# EAGLE board LilyPad SimplePower Panel-v14 (EAGLE 6.4)
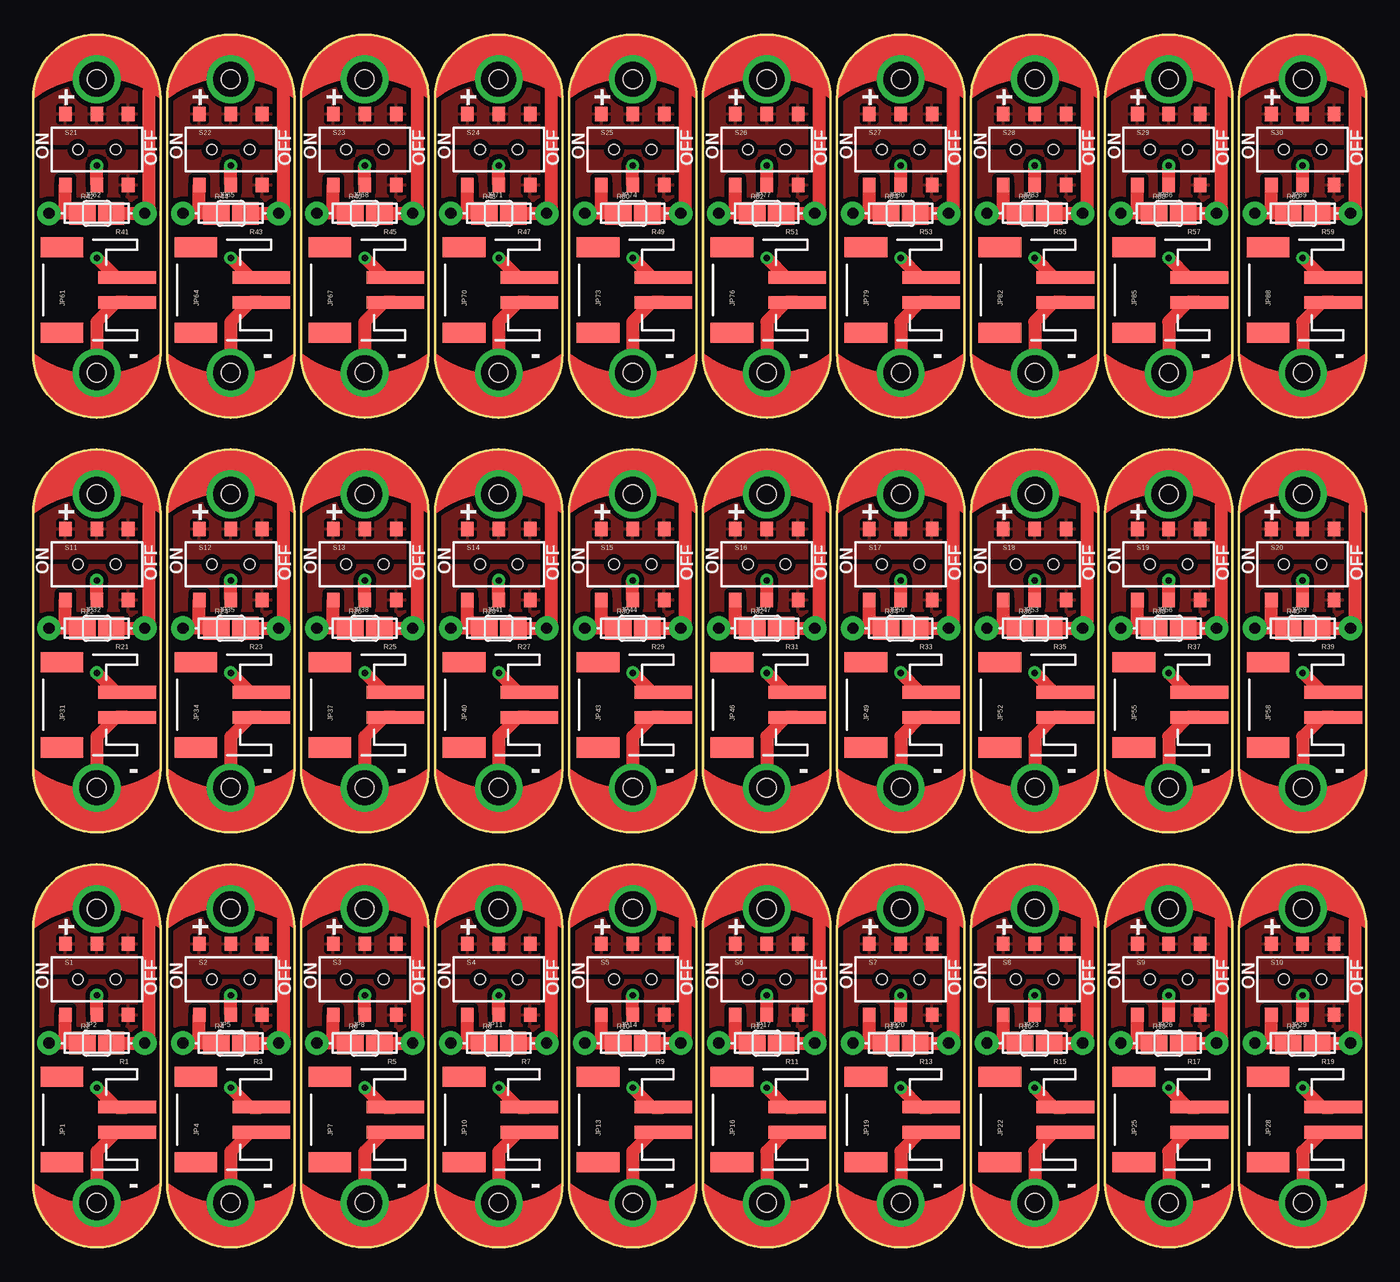
[diagram p0: board, top side]
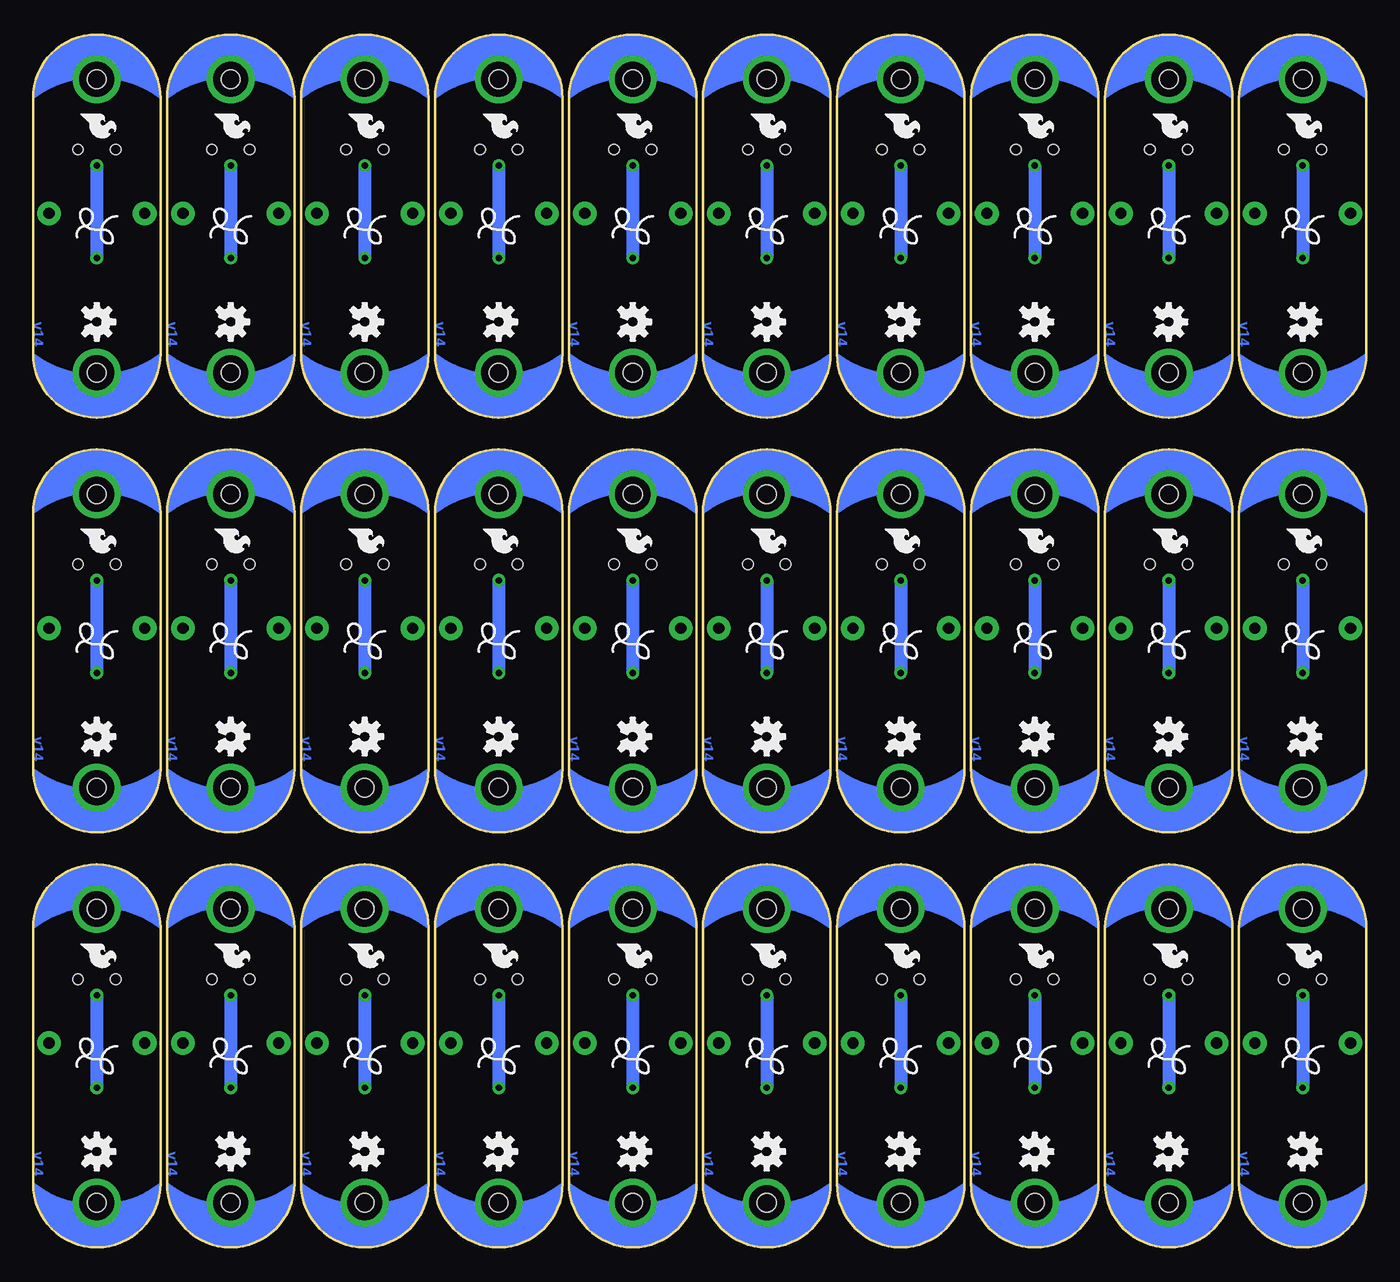
[diagram p1: board, bottom side, seen from below]

Size 106.17 x 96.52 mm. Coordinates in mm from the lower left corner, seen from the top.
Outline: 10.16,5.08 10.16,25.4 arc180 0,25.4 0,5.08 arc180 10.16,5.08
Outline: 20.83,5.08 20.83,25.4 arc180 10.67,25.4 10.67,5.08 arc180 20.83,5.08
Outline: 31.5,5.08 31.5,25.4 arc180 21.34,25.4 21.34,5.08 arc180 31.5,5.08
Outline: 42.16,5.08 42.16,25.4 arc180 32,25.4 32,5.08 arc180 42.16,5.08
Outline: 52.83,5.08 52.83,25.4 arc180 42.67,25.4 42.67,5.08 arc180 52.83,5.08
Outline: 63.5,5.08 63.5,25.4 arc180 53.34,25.4 53.34,5.08 arc180 63.5,5.08
Outline: 74.17,5.08 74.17,25.4 arc180 64.01,25.4 64.01,5.08 arc180 74.17,5.08
Outline: 84.84,5.08 84.84,25.4 arc180 74.68,25.4 74.68,5.08 arc180 84.84,5.08
Outline: 95.5,5.08 95.5,25.4 arc180 85.34,25.4 85.34,5.08 arc180 95.5,5.08
Outline: 106.17,5.08 106.17,25.4 arc180 96.01,25.4 96.01,5.08 arc180 106.17,5.08
Outline: 10.16,38.1 10.16,58.42 arc180 0,58.42 0,38.1 arc180 10.16,38.1
Outline: 20.83,38.1 20.83,58.42 arc180 10.67,58.42 10.67,38.1 arc180 20.83,38.1
Outline: 31.5,38.1 31.5,58.42 arc180 21.34,58.42 21.34,38.1 arc180 31.5,38.1
Outline: 42.16,38.1 42.16,58.42 arc180 32,58.42 32,38.1 arc180 42.16,38.1
Outline: 52.83,38.1 52.83,58.42 arc180 42.67,58.42 42.67,38.1 arc180 52.83,38.1
Outline: 63.5,38.1 63.5,58.42 arc180 53.34,58.42 53.34,38.1 arc180 63.5,38.1
Outline: 74.17,38.1 74.17,58.42 arc180 64.01,58.42 64.01,38.1 arc180 74.17,38.1
Outline: 84.84,38.1 84.84,58.42 arc180 74.68,58.42 74.68,38.1 arc180 84.84,38.1
Outline: 95.5,38.1 95.5,58.42 arc180 85.34,58.42 85.34,38.1 arc180 95.5,38.1
Outline: 106.17,38.1 106.17,58.42 arc180 96.01,58.42 96.01,38.1 arc180 106.17,38.1
Outline: 10.16,71.12 10.16,91.44 arc180 0,91.44 0,71.12 arc180 10.16,71.12
Outline: 20.83,71.12 20.83,91.44 arc180 10.67,91.44 10.67,71.12 arc180 20.83,71.12
Outline: 31.5,71.12 31.5,91.44 arc180 21.34,91.44 21.34,71.12 arc180 31.5,71.12
Outline: 42.16,71.12 42.16,91.44 arc180 32,91.44 32,71.12 arc180 42.16,71.12
Outline: 52.83,71.12 52.83,91.44 arc180 42.67,91.44 42.67,71.12 arc180 52.83,71.12
Outline: 63.5,71.12 63.5,91.44 arc180 53.34,91.44 53.34,71.12 arc180 63.5,71.12
Outline: 74.17,71.12 74.17,91.44 arc180 64.01,91.44 64.01,71.12 arc180 74.17,71.12
Outline: 84.84,71.12 84.84,91.44 arc180 74.68,91.44 74.68,71.12 arc180 84.84,71.12
Outline: 95.5,71.12 95.5,91.44 arc180 85.34,91.44 85.34,71.12 arc180 95.5,71.12
Outline: 106.17,71.12 106.17,91.44 arc180 96.01,91.44 96.01,71.12 arc180 106.17,71.12
Copper layers (1*16): Top 0.035mm / dielectric 1.5mm / Bottom 0.035mm
Design rules "SparkFun": minimum track width 8mil, minimum drill 20mil, track to track 8mil, track to pad 8mil, pad to pad 8mil, via to via 8mil, smd to smd 8mil, copper to edge 10mil, drill to drill 8mil, minimum pad ring 12mil, minimum via ring 10mil, stop-mask expansion 4mil, vias tented up to drill 20mil, thermal gap 10mil

## Footprints (pad centres in the part's own frame; a part is rotated, then mirrored left to right if it is on the bottom)
JST-2-SMD = smd 1 x 4.6: 1 -1,-3.7; 2 1,-3.7 | smd 1.6 x 3.4: NC1 -3.4,1.5; NC2 3.4,1.5
SJ_2S = smd 0.635 x 1.27: 1 -0.412,0; 2 0.412,0
AXIAL-0.3 = drill 0.9 pad 1.88: P$1 -3.81,0; P$2 3.81,0
1206 = smd 1.6 x 1.8: 1 -1.4,0; 2 1.4,0
AYZ0202 = smd 1 x 1.15: 1 -2.5,2.825; 2 0,2.825; 3 2.5,2.825; 4 -2.5,-2.825; 5 0,-2.825; 6 2.5,-2.825 | hole 0.85: 1.5,0; -1.5,0
PETAL-LARGE-2SIDE = drill 2.794: 1 0,3.556 | hole 1.5: 0,3.556

## Placement (x,y rotation side)
JP1  [JST-2-SMD]  3.81,10.16 90 top
JP2  [SJ_2S]  5.08,16.26 0 top
JP3  LOGO-SFESK  [SFE-LOGO-FLAME]  6.35,24.13 270 bottom
JP4  [JST-2-SMD]  14.48,10.16 90 top
JP5  [SJ_2S]  15.75,16.26 0 top
JP6  LOGO-SFESK  [SFE-LOGO-FLAME]  17.02,24.13 270 bottom
JP7  [JST-2-SMD]  25.15,10.16 90 top
JP8  [SJ_2S]  26.42,16.26 0 top
JP9  LOGO-SFESK  [SFE-LOGO-FLAME]  27.69,24.13 270 bottom
JP10  [JST-2-SMD]  35.81,10.16 90 top
JP11  [SJ_2S]  37.08,16.26 0 top
JP12  LOGO-SFESK  [SFE-LOGO-FLAME]  38.35,24.13 270 bottom
JP13  [JST-2-SMD]  46.48,10.16 90 top
JP14  [SJ_2S]  47.75,16.26 0 top
JP15  LOGO-SFESK  [SFE-LOGO-FLAME]  49.02,24.13 270 bottom
JP16  [JST-2-SMD]  57.15,10.16 90 top
JP17  [SJ_2S]  58.42,16.26 0 top
JP18  LOGO-SFESK  [SFE-LOGO-FLAME]  59.69,24.13 270 bottom
JP19  [JST-2-SMD]  67.82,10.16 90 top
JP20  [SJ_2S]  69.09,16.26 0 top
JP21  LOGO-SFESK  [SFE-LOGO-FLAME]  70.36,24.13 270 bottom
JP22  [JST-2-SMD]  78.49,10.16 90 top
JP23  [SJ_2S]  79.76,16.26 0 top
JP24  LOGO-SFESK  [SFE-LOGO-FLAME]  81.03,24.13 270 bottom
JP25  [JST-2-SMD]  89.15,10.16 90 top
JP26  [SJ_2S]  90.42,16.26 0 top
JP27  LOGO-SFESK  [SFE-LOGO-FLAME]  91.69,24.13 270 bottom
JP28  [JST-2-SMD]  99.82,10.16 90 top
JP29  [SJ_2S]  101.09,16.26 0 top
JP30  LOGO-SFESK  [SFE-LOGO-FLAME]  102.36,24.13 270 bottom
JP31  [JST-2-SMD]  3.81,43.18 90 top
JP32  [SJ_2S]  5.08,49.28 0 top
JP33  LOGO-SFESK  [SFE-LOGO-FLAME]  6.35,57.15 270 bottom
JP34  [JST-2-SMD]  14.48,43.18 90 top
JP35  [SJ_2S]  15.75,49.28 0 top
JP36  LOGO-SFESK  [SFE-LOGO-FLAME]  17.02,57.15 270 bottom
JP37  [JST-2-SMD]  25.15,43.18 90 top
JP38  [SJ_2S]  26.42,49.28 0 top
JP39  LOGO-SFESK  [SFE-LOGO-FLAME]  27.69,57.15 270 bottom
JP40  [JST-2-SMD]  35.81,43.18 90 top
JP41  [SJ_2S]  37.08,49.28 0 top
JP42  LOGO-SFESK  [SFE-LOGO-FLAME]  38.35,57.15 270 bottom
JP43  [JST-2-SMD]  46.48,43.18 90 top
JP44  [SJ_2S]  47.75,49.28 0 top
JP45  LOGO-SFESK  [SFE-LOGO-FLAME]  49.02,57.15 270 bottom
JP46  [JST-2-SMD]  57.15,43.18 90 top
JP47  [SJ_2S]  58.42,49.28 0 top
JP48  LOGO-SFESK  [SFE-LOGO-FLAME]  59.69,57.15 270 bottom
JP49  [JST-2-SMD]  67.82,43.18 90 top
JP50  [SJ_2S]  69.09,49.28 0 top
JP51  LOGO-SFESK  [SFE-LOGO-FLAME]  70.36,57.15 270 bottom
JP52  [JST-2-SMD]  78.49,43.18 90 top
JP53  [SJ_2S]  79.76,49.28 0 top
JP54  LOGO-SFESK  [SFE-LOGO-FLAME]  81.03,57.15 270 bottom
JP55  [JST-2-SMD]  89.15,43.18 90 top
JP56  [SJ_2S]  90.42,49.28 0 top
JP57  LOGO-SFESK  [SFE-LOGO-FLAME]  91.69,57.15 270 bottom
JP58  [JST-2-SMD]  99.82,43.18 90 top
JP59  [SJ_2S]  101.09,49.28 0 top
JP60  LOGO-SFESK  [SFE-LOGO-FLAME]  102.36,57.15 270 bottom
JP61  [JST-2-SMD]  3.81,76.2 90 top
JP62  [SJ_2S]  5.08,82.3 0 top
JP63  LOGO-SFESK  [SFE-LOGO-FLAME]  6.35,90.17 270 bottom
JP64  [JST-2-SMD]  14.48,76.2 90 top
JP65  [SJ_2S]  15.75,82.3 0 top
JP66  LOGO-SFESK  [SFE-LOGO-FLAME]  17.02,90.17 270 bottom
JP67  [JST-2-SMD]  25.15,76.2 90 top
JP68  [SJ_2S]  26.42,82.3 0 top
JP69  LOGO-SFESK  [SFE-LOGO-FLAME]  27.69,90.17 270 bottom
JP70  [JST-2-SMD]  35.81,76.2 90 top
JP71  [SJ_2S]  37.08,82.3 0 top
JP72  LOGO-SFESK  [SFE-LOGO-FLAME]  38.35,90.17 270 bottom
JP73  [JST-2-SMD]  46.48,76.2 90 top
JP74  [SJ_2S]  47.75,82.3 0 top
JP75  LOGO-SFESK  [SFE-LOGO-FLAME]  49.02,90.17 270 bottom
JP76  [JST-2-SMD]  57.15,76.2 90 top
JP77  [SJ_2S]  58.42,82.3 0 top
JP78  LOGO-SFESK  [SFE-LOGO-FLAME]  59.69,90.17 270 bottom
JP79  [JST-2-SMD]  67.82,76.2 90 top
JP80  [SJ_2S]  69.09,82.3 0 top
JP81  LOGO-SFESK  [SFE-LOGO-FLAME]  70.36,90.17 270 bottom
JP82  [JST-2-SMD]  78.49,76.2 90 top
JP83  [SJ_2S]  79.76,82.3 0 top
JP84  LOGO-SFESK  [SFE-LOGO-FLAME]  81.03,90.17 270 bottom
JP85  [JST-2-SMD]  89.15,76.2 90 top
JP86  [SJ_2S]  90.42,82.3 0 top
JP87  LOGO-SFESK  [SFE-LOGO-FLAME]  91.69,90.17 270 bottom
JP88  [JST-2-SMD]  99.82,76.2 90 top
JP89  [SJ_2S]  101.09,82.3 0 top
JP90  LOGO-SFESK  [SFE-LOGO-FLAME]  102.36,90.17 270 bottom
R1  [AXIAL-0.3]  5.08,16.26 180 top
R2  [1206]  5.08,16.26 0 top
R3  [AXIAL-0.3]  15.75,16.26 180 top
R4  [1206]  15.75,16.26 0 top
R5  [AXIAL-0.3]  26.42,16.26 180 top
R6  [1206]  26.42,16.26 0 top
R7  [AXIAL-0.3]  37.08,16.26 180 top
R8  [1206]  37.08,16.26 0 top
R9  [AXIAL-0.3]  47.75,16.26 180 top
R10  [1206]  47.75,16.26 0 top
R11  [AXIAL-0.3]  58.42,16.26 180 top
R12  [1206]  58.42,16.26 0 top
R13  [AXIAL-0.3]  69.09,16.26 180 top
R14  [1206]  69.09,16.26 0 top
R15  [AXIAL-0.3]  79.76,16.26 180 top
R16  [1206]  79.76,16.26 0 top
R17  [AXIAL-0.3]  90.42,16.26 180 top
R18  [1206]  90.42,16.26 0 top
R19  [AXIAL-0.3]  101.09,16.26 180 top
R20  [1206]  101.09,16.26 0 top
R21  [AXIAL-0.3]  5.08,49.28 180 top
R22  [1206]  5.08,49.28 0 top
R23  [AXIAL-0.3]  15.75,49.28 180 top
R24  [1206]  15.75,49.28 0 top
R25  [AXIAL-0.3]  26.42,49.28 180 top
R26  [1206]  26.42,49.28 0 top
R27  [AXIAL-0.3]  37.08,49.28 180 top
R28  [1206]  37.08,49.28 0 top
R29  [AXIAL-0.3]  47.75,49.28 180 top
R30  [1206]  47.75,49.28 0 top
R31  [AXIAL-0.3]  58.42,49.28 180 top
R32  [1206]  58.42,49.28 0 top
R33  [AXIAL-0.3]  69.09,49.28 180 top
R34  [1206]  69.09,49.28 0 top
R35  [AXIAL-0.3]  79.76,49.28 180 top
R36  [1206]  79.76,49.28 0 top
R37  [AXIAL-0.3]  90.42,49.28 180 top
R38  [1206]  90.42,49.28 0 top
R39  [AXIAL-0.3]  101.09,49.28 180 top
R40  [1206]  101.09,49.28 0 top
R41  [AXIAL-0.3]  5.08,82.3 180 top
R42  [1206]  5.08,82.3 0 top
R43  [AXIAL-0.3]  15.75,82.3 180 top
R44  [1206]  15.75,82.3 0 top
R45  [AXIAL-0.3]  26.42,82.3 180 top
R46  [1206]  26.42,82.3 0 top
R47  [AXIAL-0.3]  37.08,82.3 180 top
R48  [1206]  37.08,82.3 0 top
R49  [AXIAL-0.3]  47.75,82.3 180 top
R50  [1206]  47.75,82.3 0 top
R51  [AXIAL-0.3]  58.42,82.3 180 top
R52  [1206]  58.42,82.3 0 top
R53  [AXIAL-0.3]  69.09,82.3 180 top
R54  [1206]  69.09,82.3 0 top
R55  [AXIAL-0.3]  79.76,82.3 180 top
R56  [1206]  79.76,82.3 0 top
R57  [AXIAL-0.3]  90.42,82.3 180 top
R58  [1206]  90.42,82.3 0 top
R59  [AXIAL-0.3]  101.09,82.3 180 top
R60  [1206]  101.09,82.3 0 top
S1  Power  [AYZ0202]  5.08,21.34 0 top
S2  Power  [AYZ0202]  15.75,21.34 0 top
S3  Power  [AYZ0202]  26.42,21.34 0 top
S4  Power  [AYZ0202]  37.08,21.34 0 top
S5  Power  [AYZ0202]  47.75,21.34 0 top
S6  Power  [AYZ0202]  58.42,21.34 0 top
S7  Power  [AYZ0202]  69.09,21.34 0 top
S8  Power  [AYZ0202]  79.76,21.34 0 top
S9  Power  [AYZ0202]  90.42,21.34 0 top
S10  Power  [AYZ0202]  101.09,21.34 0 top
S11  Power  [AYZ0202]  5.08,54.36 0 top
S12  Power  [AYZ0202]  15.75,54.36 0 top
S13  Power  [AYZ0202]  26.42,54.36 0 top
S14  Power  [AYZ0202]  37.08,54.36 0 top
S15  Power  [AYZ0202]  47.75,54.36 0 top
S16  Power  [AYZ0202]  58.42,54.36 0 top
S17  Power  [AYZ0202]  69.09,54.36 0 top
S18  Power  [AYZ0202]  79.76,54.36 0 top
S19  Power  [AYZ0202]  90.42,54.36 0 top
S20  Power  [AYZ0202]  101.09,54.36 0 top
S21  Power  [AYZ0202]  5.08,87.38 0 top
S22  Power  [AYZ0202]  15.75,87.38 0 top
S23  Power  [AYZ0202]  26.42,87.38 0 top
S24  Power  [AYZ0202]  37.08,87.38 0 top
S25  Power  [AYZ0202]  47.75,87.38 0 top
S26  Power  [AYZ0202]  58.42,87.38 0 top
S27  Power  [AYZ0202]  69.09,87.38 0 top
S28  Power  [AYZ0202]  79.76,87.38 0 top
S29  Power  [AYZ0202]  90.42,87.38 0 top
S30  Power  [AYZ0202]  101.09,87.38 0 top
U$1  LOGO-LPL  [LOGO-L]  5.08,15.24 270 bottom
U$2  SEWTAP7  [PETAL-LARGE-2SIDE]  15.75,0 0 top
U$3  SEWTAP7  [PETAL-LARGE-2SIDE]  5.08,0 0 top
U$4  SEWTAP7  [PETAL-LARGE-2SIDE]  5.08,30.48 180 top
U$5  OSHW-LOGOS  [OSHW-LOGO-S]  5.08,7.62 270 bottom
U$6  SEWTAP7  [PETAL-LARGE-2SIDE]  15.75,30.48 180 top
U$7  LOGO-LPL  [LOGO-L]  15.75,15.24 270 bottom
U$8  OSHW-LOGOS  [OSHW-LOGO-S]  15.75,7.62 270 bottom
U$9  SEWTAP7  [PETAL-LARGE-2SIDE]  26.42,0 0 top
U$10  SEWTAP7  [PETAL-LARGE-2SIDE]  26.42,30.48 180 top
U$11  LOGO-LPL  [LOGO-L]  26.42,15.24 270 bottom
U$12  OSHW-LOGOS  [OSHW-LOGO-S]  26.42,7.62 270 bottom
U$13  SEWTAP7  [PETAL-LARGE-2SIDE]  37.08,0 0 top
U$14  SEWTAP7  [PETAL-LARGE-2SIDE]  37.08,30.48 180 top
U$15  LOGO-LPL  [LOGO-L]  37.08,15.24 270 bottom
U$16  OSHW-LOGOS  [OSHW-LOGO-S]  37.08,7.62 270 bottom
U$17  SEWTAP7  [PETAL-LARGE-2SIDE]  47.75,0 0 top
U$18  SEWTAP7  [PETAL-LARGE-2SIDE]  47.75,30.48 180 top
U$19  LOGO-LPL  [LOGO-L]  47.75,15.24 270 bottom
U$20  OSHW-LOGOS  [OSHW-LOGO-S]  47.75,7.62 270 bottom
U$21  SEWTAP7  [PETAL-LARGE-2SIDE]  58.42,0 0 top
U$22  SEWTAP7  [PETAL-LARGE-2SIDE]  58.42,30.48 180 top
U$23  LOGO-LPL  [LOGO-L]  58.42,15.24 270 bottom
U$24  OSHW-LOGOS  [OSHW-LOGO-S]  58.42,7.62 270 bottom
U$25  SEWTAP7  [PETAL-LARGE-2SIDE]  69.09,0 0 top
U$26  SEWTAP7  [PETAL-LARGE-2SIDE]  69.09,30.48 180 top
U$27  LOGO-LPL  [LOGO-L]  69.09,15.24 270 bottom
U$28  OSHW-LOGOS  [OSHW-LOGO-S]  69.09,7.62 270 bottom
U$29  SEWTAP7  [PETAL-LARGE-2SIDE]  79.76,0 0 top
U$30  SEWTAP7  [PETAL-LARGE-2SIDE]  79.76,30.48 180 top
U$31  LOGO-LPL  [LOGO-L]  79.76,15.24 270 bottom
U$32  OSHW-LOGOS  [OSHW-LOGO-S]  79.76,7.62 270 bottom
U$33  SEWTAP7  [PETAL-LARGE-2SIDE]  90.42,0 0 top
U$34  SEWTAP7  [PETAL-LARGE-2SIDE]  90.42,30.48 180 top
U$35  LOGO-LPL  [LOGO-L]  90.42,15.24 270 bottom
U$36  OSHW-LOGOS  [OSHW-LOGO-S]  90.42,7.62 270 bottom
U$37  SEWTAP7  [PETAL-LARGE-2SIDE]  101.09,0 0 top
U$38  SEWTAP7  [PETAL-LARGE-2SIDE]  101.09,30.48 180 top
U$39  LOGO-LPL  [LOGO-L]  101.09,15.24 270 bottom
U$40  OSHW-LOGOS  [OSHW-LOGO-S]  101.09,7.62 270 bottom
U$41  SEWTAP7  [PETAL-LARGE-2SIDE]  5.08,33.02 0 top
U$42  SEWTAP7  [PETAL-LARGE-2SIDE]  5.08,63.5 180 top
U$43  LOGO-LPL  [LOGO-L]  5.08,48.26 270 bottom
U$44  OSHW-LOGOS  [OSHW-LOGO-S]  5.08,40.64 270 bottom
U$45  SEWTAP7  [PETAL-LARGE-2SIDE]  15.75,33.02 0 top
U$46  SEWTAP7  [PETAL-LARGE-2SIDE]  15.75,63.5 180 top
U$47  LOGO-LPL  [LOGO-L]  15.75,48.26 270 bottom
U$48  OSHW-LOGOS  [OSHW-LOGO-S]  15.75,40.64 270 bottom
U$49  SEWTAP7  [PETAL-LARGE-2SIDE]  26.42,33.02 0 top
U$50  SEWTAP7  [PETAL-LARGE-2SIDE]  26.42,63.5 180 top
U$51  LOGO-LPL  [LOGO-L]  26.42,48.26 270 bottom
U$52  OSHW-LOGOS  [OSHW-LOGO-S]  26.42,40.64 270 bottom
U$53  SEWTAP7  [PETAL-LARGE-2SIDE]  37.08,33.02 0 top
U$54  SEWTAP7  [PETAL-LARGE-2SIDE]  37.08,63.5 180 top
U$55  LOGO-LPL  [LOGO-L]  37.08,48.26 270 bottom
U$56  OSHW-LOGOS  [OSHW-LOGO-S]  37.08,40.64 270 bottom
U$57  SEWTAP7  [PETAL-LARGE-2SIDE]  47.75,33.02 0 top
U$58  SEWTAP7  [PETAL-LARGE-2SIDE]  47.75,63.5 180 top
U$59  LOGO-LPL  [LOGO-L]  47.75,48.26 270 bottom
U$60  OSHW-LOGOS  [OSHW-LOGO-S]  47.75,40.64 270 bottom
U$61  SEWTAP7  [PETAL-LARGE-2SIDE]  58.42,33.02 0 top
U$62  SEWTAP7  [PETAL-LARGE-2SIDE]  58.42,63.5 180 top
U$63  LOGO-LPL  [LOGO-L]  58.42,48.26 270 bottom
U$64  OSHW-LOGOS  [OSHW-LOGO-S]  58.42,40.64 270 bottom
U$65  SEWTAP7  [PETAL-LARGE-2SIDE]  69.09,33.02 0 top
U$66  SEWTAP7  [PETAL-LARGE-2SIDE]  69.09,63.5 180 top
U$67  LOGO-LPL  [LOGO-L]  69.09,48.26 270 bottom
U$68  OSHW-LOGOS  [OSHW-LOGO-S]  69.09,40.64 270 bottom
U$69  SEWTAP7  [PETAL-LARGE-2SIDE]  79.76,33.02 0 top
U$70  SEWTAP7  [PETAL-LARGE-2SIDE]  79.76,63.5 180 top
U$71  LOGO-LPL  [LOGO-L]  79.76,48.26 270 bottom
U$72  OSHW-LOGOS  [OSHW-LOGO-S]  79.76,40.64 270 bottom
U$73  SEWTAP7  [PETAL-LARGE-2SIDE]  90.42,33.02 0 top
U$74  SEWTAP7  [PETAL-LARGE-2SIDE]  90.42,63.5 180 top
U$75  LOGO-LPL  [LOGO-L]  90.42,48.26 270 bottom
U$76  OSHW-LOGOS  [OSHW-LOGO-S]  90.42,40.64 270 bottom
U$77  SEWTAP7  [PETAL-LARGE-2SIDE]  101.09,33.02 0 top
U$78  SEWTAP7  [PETAL-LARGE-2SIDE]  101.09,63.5 180 top
U$79  LOGO-LPL  [LOGO-L]  101.09,48.26 270 bottom
U$80  OSHW-LOGOS  [OSHW-LOGO-S]  101.09,40.64 270 bottom
U$81  SEWTAP7  [PETAL-LARGE-2SIDE]  5.08,66.04 0 top
U$82  SEWTAP7  [PETAL-LARGE-2SIDE]  5.08,96.52 180 top
U$83  LOGO-LPL  [LOGO-L]  5.08,81.28 270 bottom
U$84  OSHW-LOGOS  [OSHW-LOGO-S]  5.08,73.66 270 bottom
U$85  SEWTAP7  [PETAL-LARGE-2SIDE]  15.75,66.04 0 top
U$86  SEWTAP7  [PETAL-LARGE-2SIDE]  15.75,96.52 180 top
U$87  LOGO-LPL  [LOGO-L]  15.75,81.28 270 bottom
U$88  OSHW-LOGOS  [OSHW-LOGO-S]  15.75,73.66 270 bottom
U$89  SEWTAP7  [PETAL-LARGE-2SIDE]  26.42,66.04 0 top
U$90  SEWTAP7  [PETAL-LARGE-2SIDE]  26.42,96.52 180 top
U$91  LOGO-LPL  [LOGO-L]  26.42,81.28 270 bottom
U$92  OSHW-LOGOS  [OSHW-LOGO-S]  26.42,73.66 270 bottom
U$93  SEWTAP7  [PETAL-LARGE-2SIDE]  37.08,66.04 0 top
U$94  SEWTAP7  [PETAL-LARGE-2SIDE]  37.08,96.52 180 top
U$95  LOGO-LPL  [LOGO-L]  37.08,81.28 270 bottom
U$96  OSHW-LOGOS  [OSHW-LOGO-S]  37.08,73.66 270 bottom
U$97  SEWTAP7  [PETAL-LARGE-2SIDE]  47.75,66.04 0 top
U$98  SEWTAP7  [PETAL-LARGE-2SIDE]  47.75,96.52 180 top
U$99  LOGO-LPL  [LOGO-L]  47.75,81.28 270 bottom
U$100  OSHW-LOGOS  [OSHW-LOGO-S]  47.75,73.66 270 bottom
U$101  SEWTAP7  [PETAL-LARGE-2SIDE]  58.42,66.04 0 top
U$102  SEWTAP7  [PETAL-LARGE-2SIDE]  58.42,96.52 180 top
U$103  LOGO-LPL  [LOGO-L]  58.42,81.28 270 bottom
U$104  OSHW-LOGOS  [OSHW-LOGO-S]  58.42,73.66 270 bottom
U$105  SEWTAP7  [PETAL-LARGE-2SIDE]  69.09,66.04 0 top
U$106  SEWTAP7  [PETAL-LARGE-2SIDE]  69.09,96.52 180 top
U$107  LOGO-LPL  [LOGO-L]  69.09,81.28 270 bottom
U$108  OSHW-LOGOS  [OSHW-LOGO-S]  69.09,73.66 270 bottom
U$109  SEWTAP7  [PETAL-LARGE-2SIDE]  79.76,66.04 0 top
U$110  SEWTAP7  [PETAL-LARGE-2SIDE]  79.76,96.52 180 top
U$111  LOGO-LPL  [LOGO-L]  79.76,81.28 270 bottom
U$112  OSHW-LOGOS  [OSHW-LOGO-S]  79.76,73.66 270 bottom
U$113  SEWTAP7  [PETAL-LARGE-2SIDE]  90.42,66.04 0 top
U$114  SEWTAP7  [PETAL-LARGE-2SIDE]  90.42,96.52 180 top
U$115  LOGO-LPL  [LOGO-L]  90.42,81.28 270 bottom
U$116  OSHW-LOGOS  [OSHW-LOGO-S]  90.42,73.66 270 bottom
U$117  SEWTAP7  [PETAL-LARGE-2SIDE]  101.09,66.04 0 top
U$118  SEWTAP7  [PETAL-LARGE-2SIDE]  101.09,96.52 180 top
U$119  LOGO-LPL  [LOGO-L]  101.09,81.28 270 bottom
U$120  OSHW-LOGOS  [OSHW-LOGO-S]  101.09,73.66 270 bottom

## Library data of the parts
JP1 JP4 JP7 JP10 JP13 JP16 JP19 JP22 JP25 JP28 JP31 JP34 JP37 JP40 JP43 JP46 JP49 JP52 JP55 JP58 JP61 JP64 JP67 JP70 JP73 JP76 JP79 JP82 JP85 JP88 R1-R60 S1-S30 = SparkFun
JP2 JP5 JP8 JP11 JP14 JP17 JP20 JP23 JP26 JP29 JP32 JP35 JP38 JP41 JP44 JP47 JP50 JP53 JP56 JP59 JP62 JP65 JP68 JP71 JP74 JP77 JP80 JP83 JP86 JP89 = SparkFun-Passives
JP3 JP6 JP9 JP12 JP15 JP18 JP21 JP24 JP27 JP30 JP33 JP36 JP39 JP42 JP45 JP48 JP51 JP54 JP57 JP60 JP63 JP66 JP69 JP72 JP75 JP78 JP81 JP84 JP87 JP90 U$5 U$8 U$12 U$16 U$20 U$24 U$28 U$32 U$36 U$40 U$44 U$48 U$52 U$56 U$60 U$64 U$68 U$72 U$76 U$80 U$84 U$88 U$92 U$96 U$100 U$104 U$108 U$112 U$116 U$120 = SparkFun-Aesthetics
U$1-U$4 U$6 U$7 U$9-U$11 U$13-U$15 U$17-U$19 U$21-U$23 U$25-U$27 U$29-U$31 U$33-U$35 U$37-U$39 U$41-U$43 U$45-U$47 U$49-U$51 U$53-U$55 U$57-U$59 U$61-U$63 U$65-U$67 U$69-U$71 U$73-U$75 U$77-U$79 U$81-U$83 U$85-U$87 U$89-U$91 U$93-U$95 U$97-U$99 U$101-U$103 U$105-U$107 U$109-U$111 U$113-U$115 U$117-U$119 = LilyPad-Wearables

## Nets
+: JP2.2 R1.P$1 R2.2 U$4.1
+1: JP5.2 R3.P$1 R4.2 U$6.1
+2: JP8.2 R5.P$1 R6.2 U$10.1
+3: JP11.2 R7.P$1 R8.2 U$14.1
+4: JP14.2 R9.P$1 R10.2 U$18.1
+5: JP17.2 R11.P$1 R12.2 U$22.1
+6: JP20.2 R13.P$1 R14.2 U$26.1
+7: JP23.2 R15.P$1 R16.2 U$30.1
+8: JP26.2 R17.P$1 R18.2 U$34.1
+9: JP29.2 R19.P$1 R20.2 U$38.1
+10: JP32.2 R21.P$1 R22.2 U$42.1
+11: JP35.2 R23.P$1 R24.2 U$46.1
+12: JP38.2 R25.P$1 R26.2 U$50.1
+13: JP41.2 R27.P$1 R28.2 U$54.1
+14: JP44.2 R29.P$1 R30.2 U$58.1
+15: JP47.2 R31.P$1 R32.2 U$62.1
+16: JP50.2 R33.P$1 R34.2 U$66.1
+17: JP53.2 R35.P$1 R36.2 U$70.1
+18: JP56.2 R37.P$1 R38.2 U$74.1
+19: JP59.2 R39.P$1 R40.2 U$78.1
+20: JP62.2 R41.P$1 R42.2 U$82.1
+21: JP65.2 R43.P$1 R44.2 U$86.1
+22: JP68.2 R45.P$1 R46.2 U$90.1
+23: JP71.2 R47.P$1 R48.2 U$94.1
+24: JP74.2 R49.P$1 R50.2 U$98.1
+25: JP77.2 R51.P$1 R52.2 U$102.1
+26: JP80.2 R53.P$1 R54.2 U$106.1
+27: JP83.2 R55.P$1 R56.2 U$110.1
+28: JP86.2 R57.P$1 R58.2 U$114.1
+29: JP89.2 R59.P$1 R60.2 U$118.1
GND: JP1.1 U$3.1
GND1: JP4.1 U$2.1
GND2: JP7.1 U$9.1
GND3: JP10.1 U$13.1
GND4: JP13.1 U$17.1
GND5: JP16.1 U$21.1
GND6: JP19.1 U$25.1
GND7: JP22.1 U$29.1
GND8: JP25.1 U$33.1
GND9: JP28.1 U$37.1
GND10: JP31.1 U$41.1
GND11: JP34.1 U$45.1
GND12: JP37.1 U$49.1
GND13: JP40.1 U$53.1
GND14: JP43.1 U$57.1
GND15: JP46.1 U$61.1
GND16: JP49.1 U$65.1
GND17: JP52.1 U$69.1
GND18: JP55.1 U$73.1
GND19: JP58.1 U$77.1
GND20: JP61.1 U$81.1
GND21: JP64.1 U$85.1
GND22: JP67.1 U$89.1
GND23: JP70.1 U$93.1
GND24: JP73.1 U$97.1
GND25: JP76.1 U$101.1
GND26: JP79.1 U$105.1
GND27: JP82.1 U$109.1
GND28: JP85.1 U$113.1
GND29: JP88.1 U$117.1
N$1: JP1.2 S1.5
N$2: JP2.1 R1.P$2 R2.1 S1.4
N$3: JP5.1 R3.P$2 R4.1 S2.4
N$4: JP4.2 S2.5
N$5: JP8.1 R5.P$2 R6.1 S3.4
N$6: JP7.2 S3.5
N$7: JP11.1 R7.P$2 R8.1 S4.4
N$8: JP10.2 S4.5
N$9: JP14.1 R9.P$2 R10.1 S5.4
N$10: JP13.2 S5.5
N$11: JP17.1 R11.P$2 R12.1 S6.4
N$12: JP16.2 S6.5
N$13: JP20.1 R13.P$2 R14.1 S7.4
N$14: JP19.2 S7.5
N$15: JP23.1 R15.P$2 R16.1 S8.4
N$16: JP22.2 S8.5
N$17: JP26.1 R17.P$2 R18.1 S9.4
N$18: JP25.2 S9.5
N$19: JP29.1 R19.P$2 R20.1 S10.4
N$20: JP28.2 S10.5
N$21: JP32.1 R21.P$2 R22.1 S11.4
N$22: JP31.2 S11.5
N$23: JP35.1 R23.P$2 R24.1 S12.4
N$24: JP34.2 S12.5
N$25: JP38.1 R25.P$2 R26.1 S13.4
N$26: JP37.2 S13.5
N$27: JP41.1 R27.P$2 R28.1 S14.4
N$28: JP40.2 S14.5
N$29: JP44.1 R29.P$2 R30.1 S15.4
N$30: JP43.2 S15.5
N$31: JP47.1 R31.P$2 R32.1 S16.4
N$32: JP46.2 S16.5
N$33: JP50.1 R33.P$2 R34.1 S17.4
N$34: JP49.2 S17.5
N$35: JP53.1 R35.P$2 R36.1 S18.4
N$36: JP52.2 S18.5
N$37: JP56.1 R37.P$2 R38.1 S19.4
N$38: JP55.2 S19.5
N$39: JP59.1 R39.P$2 R40.1 S20.4
N$40: JP58.2 S20.5
N$41: JP62.1 R41.P$2 R42.1 S21.4
N$42: JP61.2 S21.5
N$43: JP65.1 R43.P$2 R44.1 S22.4
N$44: JP64.2 S22.5
N$45: JP68.1 R45.P$2 R46.1 S23.4
N$46: JP67.2 S23.5
N$47: JP71.1 R47.P$2 R48.1 S24.4
N$48: JP70.2 S24.5
N$49: JP74.1 R49.P$2 R50.1 S25.4
N$50: JP73.2 S25.5
N$51: JP77.1 R51.P$2 R52.1 S26.4
N$52: JP76.2 S26.5
N$53: JP80.1 R53.P$2 R54.1 S27.4
N$54: JP79.2 S27.5
N$55: JP83.1 R55.P$2 R56.1 S28.4
N$56: JP82.2 S28.5
N$57: JP86.1 R57.P$2 R58.1 S29.4
N$58: JP85.2 S29.5
N$59: JP89.1 R59.P$2 R60.1 S30.4
N$60: JP88.2 S30.5
SINK1: S1.1 S1.2 S1.3
SINK2: S1.6
SINK3: S2.1 S2.2 S2.3
SINK4: S2.6
SINK5: S3.1 S3.2 S3.3
SINK6: S3.6
SINK7: S4.1 S4.2 S4.3
SINK8: S4.6
SINK9: S5.1 S5.2 S5.3
SINK10: S5.6
SINK11: S6.1 S6.2 S6.3
SINK12: S6.6
SINK13: S7.1 S7.2 S7.3
SINK14: S7.6
SINK15: S8.1 S8.2 S8.3
SINK16: S8.6
SINK17: S9.1 S9.2 S9.3
SINK18: S9.6
SINK19: S10.1 S10.2 S10.3
SINK20: S10.6
SINK21: S11.1 S11.2 S11.3
SINK22: S11.6
SINK23: S12.1 S12.2 S12.3
SINK24: S12.6
SINK25: S13.1 S13.2 S13.3
SINK26: S13.6
SINK27: S14.1 S14.2 S14.3
SINK28: S14.6
SINK29: S15.1 S15.2 S15.3
SINK30: S15.6
SINK31: S16.1 S16.2 S16.3
SINK32: S16.6
SINK33: S17.1 S17.2 S17.3
SINK34: S17.6
SINK35: S18.1 S18.2 S18.3
SINK36: S18.6
SINK37: S19.1 S19.2 S19.3
SINK38: S19.6
SINK39: S20.1 S20.2 S20.3
SINK40: S20.6
SINK41: S21.1 S21.2 S21.3
SINK42: S21.6
SINK43: S22.1 S22.2 S22.3
SINK44: S22.6
SINK45: S23.1 S23.2 S23.3
SINK46: S23.6
SINK47: S24.1 S24.2 S24.3
SINK48: S24.6
SINK49: S25.1 S25.2 S25.3
SINK50: S25.6
SINK51: S26.1 S26.2 S26.3
SINK52: S26.6
SINK53: S27.1 S27.2 S27.3
SINK54: S27.6
SINK55: S28.1 S28.2 S28.3
SINK56: S28.6
SINK57: S29.1 S29.2 S29.3
SINK58: S29.6
SINK59: S30.1 S30.2 S30.3
SINK60: S30.6

## Tracks (layer width: path | path; a pad name or v marks a point on that pad's centre or on a via)
+
  Top 0.254: R2.2 JP2.2 | 5.08,26.67 U$4.1 6.1,27.94 7.62,27.94 9.27,26.29 9.27,26.06
  Top 1.016: 9.27,26.06 9.27,16.64 R1.P$1 R2.2
+1
  Top 0.254: R4.2 JP5.2 | 15.75,26.67 U$6.1 16.76,27.94 18.29,27.94 19.94,26.29 19.94,26.06
  Top 1.016: 19.94,26.06 19.94,16.64 R3.P$1 R4.2
+2
  Top 0.254: R6.2 JP8.2 | 26.42,26.67 U$10.1 27.43,27.94 28.96,27.94 30.61,26.29 30.61,26.06
  Top 1.016: 30.61,26.06 30.61,16.64 R5.P$1 R6.2
+3
  Top 0.254: R8.2 JP11.2 | 37.08,26.67 U$14.1 38.1,27.94 39.62,27.94 41.27,26.29 41.27,26.06
  Top 1.016: 41.27,26.06 41.27,16.64 R7.P$1 R8.2
+4
  Top 0.254: R10.2 JP14.2 | 47.75,26.67 U$18.1 48.77,27.94 50.29,27.94 51.94,26.29 51.94,26.06
  Top 1.016: 51.94,26.06 51.94,16.64 R9.P$1 R10.2
+5
  Top 0.254: R12.2 JP17.2 | 58.42,26.67 U$22.1 59.44,27.94 60.96,27.94 62.61,26.29 62.61,26.06
  Top 1.016: 62.61,26.06 62.61,16.64 R11.P$1 R12.2
+6
  Top 0.254: R14.2 JP20.2 | 69.09,26.67 U$26.1 70.1,27.94 71.63,27.94 73.28,26.29 73.28,26.06
  Top 1.016: 73.28,26.06 73.28,16.64 R13.P$1 R14.2
+7
  Top 0.254: R16.2 JP23.2 | 79.76,26.67 U$30.1 80.77,27.94 82.3,27.94 83.95,26.29 83.95,26.06
  Top 1.016: 83.95,26.06 83.95,16.64 R15.P$1 R16.2
+8
  Top 0.254: R18.2 JP26.2 | 90.42,26.67 U$34.1 91.44,27.94 92.96,27.94 94.61,26.29 94.61,26.06
  Top 1.016: 94.61,26.06 94.61,16.64 R17.P$1 R18.2
+9
  Top 0.254: R20.2 JP29.2 | 101.09,26.67 U$38.1 102.11,27.94 103.63,27.94 105.28,26.29 105.28,26.06
  Top 1.016: 105.28,26.06 105.28,16.64 R19.P$1 R20.2
+10
  Top 0.254: R22.2 JP32.2 | 5.08,59.69 U$42.1 6.1,60.96 7.62,60.96 9.27,59.31 9.27,59.08
  Top 1.016: 9.27,59.08 9.27,49.66 R21.P$1 R22.2
+11
  Top 0.254: R24.2 JP35.2 | 15.75,59.69 U$46.1 16.76,60.96 18.29,60.96 19.94,59.31 19.94,59.08
  Top 1.016: 19.94,59.08 19.94,49.66 R23.P$1 R24.2
+12
  Top 0.254: R26.2 JP38.2 | 26.42,59.69 U$50.1 27.43,60.96 28.96,60.96 30.61,59.31 30.61,59.08
  Top 1.016: 30.61,59.08 30.61,49.66 R25.P$1 R26.2
+13
  Top 0.254: R28.2 JP41.2 | 37.08,59.69 U$54.1 38.1,60.96 39.62,60.96 41.27,59.31 41.27,59.08
  Top 1.016: 41.27,59.08 41.27,49.66 R27.P$1 R28.2
+14
  Top 0.254: R30.2 JP44.2 | 47.75,59.69 U$58.1 48.77,60.96 50.29,60.96 51.94,59.31 51.94,59.08
  Top 1.016: 51.94,59.08 51.94,49.66 R29.P$1 R30.2
+15
  Top 0.254: R32.2 JP47.2 | 58.42,59.69 U$62.1 59.44,60.96 60.96,60.96 62.61,59.31 62.61,59.08
  Top 1.016: 62.61,59.08 62.61,49.66 R31.P$1 R32.2
+16
  Top 0.254: R34.2 JP50.2 | 69.09,59.69 U$66.1 70.1,60.96 71.63,60.96 73.28,59.31 73.28,59.08
  Top 1.016: 73.28,59.08 73.28,49.66 R33.P$1 R34.2
+17
  Top 0.254: R36.2 JP53.2 | 79.76,59.69 U$70.1 80.77,60.96 82.3,60.96 83.95,59.31 83.95,59.08
  Top 1.016: 83.95,59.08 83.95,49.66 R35.P$1 R36.2
+18
  Top 0.254: R38.2 JP56.2 | 90.42,59.69 U$74.1 91.44,60.96 92.96,60.96 94.61,59.31 94.61,59.08
  Top 1.016: 94.61,59.08 94.61,49.66 R37.P$1 R38.2
+19
  Top 0.254: R40.2 JP59.2 | 101.09,59.69 U$78.1 102.11,60.96 103.63,60.96 105.28,59.31 105.28,59.08
  Top 1.016: 105.28,59.08 105.28,49.66 R39.P$1 R40.2
+20
  Top 0.254: R42.2 JP62.2 | 5.08,92.71 U$82.1 6.1,93.98 7.62,93.98 9.27,92.33 9.27,92.1
  Top 1.016: 9.27,92.1 9.27,82.68 R41.P$1 R42.2
+21
  Top 0.254: R44.2 JP65.2 | 15.75,92.71 U$86.1 16.76,93.98 18.29,93.98 19.94,92.33 19.94,92.1
  Top 1.016: 19.94,92.1 19.94,82.68 R43.P$1 R44.2
+22
  Top 0.254: R46.2 JP68.2 | 26.42,92.71 U$90.1 27.43,93.98 28.96,93.98 30.61,92.33 30.61,92.1
  Top 1.016: 30.61,92.1 30.61,82.68 R45.P$1 R46.2
+23
  Top 0.254: R48.2 JP71.2 | 37.08,92.71 U$94.1 38.1,93.98 39.62,93.98 41.27,92.33 41.27,92.1
  Top 1.016: 41.27,92.1 41.27,82.68 R47.P$1 R48.2
+24
  Top 0.254: R50.2 JP74.2 | 47.75,92.71 U$98.1 48.77,93.98 50.29,93.98 51.94,92.33 51.94,92.1
  Top 1.016: 51.94,92.1 51.94,82.68 R49.P$1 R50.2
+25
  Top 0.254: R52.2 JP77.2 | 58.42,92.71 U$102.1 59.44,93.98 60.96,93.98 62.61,92.33 62.61,92.1
  Top 1.016: 62.61,92.1 62.61,82.68 R51.P$1 R52.2
+26
  Top 0.254: R54.2 JP80.2 | 69.09,92.71 U$106.1 70.1,93.98 71.63,93.98 73.28,92.33 73.28,92.1
  Top 1.016: 73.28,92.1 73.28,82.68 R53.P$1 R54.2
+27
  Top 0.254: R56.2 JP83.2 | 79.76,92.71 U$110.1 80.77,93.98 82.3,93.98 83.95,92.33 83.95,92.1
  Top 1.016: 83.95,92.1 83.95,82.68 R55.P$1 R56.2
+28
  Top 0.254: R58.2 JP86.2 | 90.42,92.71 U$114.1 91.44,93.98 92.96,93.98 94.61,92.33 94.61,92.1
  Top 1.016: 94.61,92.1 94.61,82.68 R57.P$1 R58.2
+29
  Top 0.254: R60.2 JP89.2 | 101.09,92.71 U$118.1 102.11,93.98 103.63,93.98 105.28,92.33 105.28,92.1
  Top 1.016: 105.28,92.1 105.28,82.68 R59.P$1 R60.2
GND
  Top 1.016: JP1.1 6.62,9.16 5.08,7.62 U$3.1
GND1
  Top 1.016: JP4.1 17.29,9.16 15.75,7.62 U$2.1
GND2
  Top 1.016: JP7.1 27.96,9.16 26.42,7.62 U$9.1
GND3
  Top 1.016: JP10.1 38.62,9.16 37.08,7.62 U$13.1
GND4
  Top 1.016: JP13.1 49.29,9.16 47.75,7.62 U$17.1
GND5
  Top 1.016: JP16.1 59.96,9.16 58.42,7.62 U$21.1
GND6
  Top 1.016: JP19.1 70.63,9.16 69.09,7.62 U$25.1
GND7
  Top 1.016: JP22.1 81.3,9.16 79.76,7.62 U$29.1
GND8
  Top 1.016: JP25.1 91.96,9.16 90.42,7.62 U$33.1
GND9
  Top 1.016: JP28.1 102.63,9.16 101.09,7.62 U$37.1
GND10
  Top 1.016: JP31.1 6.62,42.18 5.08,40.64 U$41.1
GND11
  Top 1.016: JP34.1 17.29,42.18 15.75,40.64 U$45.1
GND12
  Top 1.016: JP37.1 27.96,42.18 26.42,40.64 U$49.1
GND13
  Top 1.016: JP40.1 38.62,42.18 37.08,40.64 U$53.1
GND14
  Top 1.016: JP43.1 49.29,42.18 47.75,40.64 U$57.1
GND15
  Top 1.016: JP46.1 59.96,42.18 58.42,40.64 U$61.1
GND16
  Top 1.016: JP49.1 70.63,42.18 69.09,40.64 U$65.1
GND17
  Top 1.016: JP52.1 81.3,42.18 79.76,40.64 U$69.1
GND18
  Top 1.016: JP55.1 91.96,42.18 90.42,40.64 U$73.1
GND19
  Top 1.016: JP58.1 102.63,42.18 101.09,40.64 U$77.1
GND20
  Top 1.016: JP61.1 6.62,75.2 5.08,73.66 U$81.1
GND21
  Top 1.016: JP64.1 17.29,75.2 15.75,73.66 U$85.1
GND22
  Top 1.016: JP67.1 27.96,75.2 26.42,73.66 U$89.1
GND23
  Top 1.016: JP70.1 38.62,75.2 37.08,73.66 U$93.1
GND24
  Top 1.016: JP73.1 49.29,75.2 47.75,73.66 U$97.1
GND25
  Top 1.016: JP76.1 59.96,75.2 58.42,73.66 U$101.1
GND26
  Top 1.016: JP79.1 70.63,75.2 69.09,73.66 U$105.1
GND27
  Top 1.016: JP82.1 81.3,75.2 79.76,73.66 U$109.1
GND28
  Top 1.016: JP85.1 91.96,75.2 90.42,73.66 U$113.1
GND29
  Top 1.016: JP88.1 102.63,75.2 101.09,73.66 U$117.1
N$1  (via drill 0.51)
  Top 1.016: JP1.2 6.62,11.16 v5.08,12.7 | S1.5 v5.08,20.07
  Bottom 1.016: v5.08,20.07 v5.08,12.7
N$2
  Top 0.254: R2.1 JP2.1
  Top 1.016: S1.4 2.58,16.3 2.54,16.26 | R2.1 2.54,16.26 | 2.54,16.26 R1.P$2
N$3
  Top 0.254: R4.1 JP5.1
  Top 1.016: S2.4 13.25,16.3 13.21,16.26 | R4.1 13.21,16.26 | 13.21,16.26 R3.P$2
N$4  (via drill 0.51)
  Top 1.016: JP4.2 17.29,11.16 v15.75,12.7 | S2.5 v15.75,20.07
  Bottom 1.016: v15.75,20.07 v15.75,12.7
N$5
  Top 0.254: R6.1 JP8.1
  Top 1.016: S3.4 23.92,16.3 23.88,16.26 | R6.1 23.88,16.26 | 23.88,16.26 R5.P$2
N$6  (via drill 0.51)
  Top 1.016: JP7.2 27.96,11.16 v26.42,12.7 | S3.5 v26.42,20.07
  Bottom 1.016: v26.42,20.07 v26.42,12.7
N$7
  Top 0.254: R8.1 JP11.1
  Top 1.016: S4.4 34.58,16.3 34.54,16.26 | R8.1 34.54,16.26 | 34.54,16.26 R7.P$2
N$8  (via drill 0.51)
  Top 1.016: JP10.2 38.62,11.16 v37.08,12.7 | S4.5 v37.08,20.07
  Bottom 1.016: v37.08,20.07 v37.08,12.7
N$9
  Top 0.254: R10.1 JP14.1
  Top 1.016: S5.4 45.25,16.3 45.21,16.26 | R10.1 45.21,16.26 | 45.21,16.26 R9.P$2
N$10  (via drill 0.51)
  Top 1.016: JP13.2 49.29,11.16 v47.75,12.7 | S5.5 v47.75,20.07
  Bottom 1.016: v47.75,20.07 v47.75,12.7
N$11
  Top 0.254: R12.1 JP17.1
  Top 1.016: S6.4 55.92,16.3 55.88,16.26 | R12.1 55.88,16.26 | 55.88,16.26 R11.P$2
N$12  (via drill 0.51)
  Top 1.016: JP16.2 59.96,11.16 v58.42,12.7 | S6.5 v58.42,20.07
  Bottom 1.016: v58.42,20.07 v58.42,12.7
N$13
  Top 0.254: R14.1 JP20.1
  Top 1.016: S7.4 66.59,16.3 66.55,16.26 | R14.1 66.55,16.26 | 66.55,16.26 R13.P$2
N$14  (via drill 0.51)
  Top 1.016: JP19.2 70.63,11.16 v69.09,12.7 | S7.5 v69.09,20.07
  Bottom 1.016: v69.09,20.07 v69.09,12.7
N$15
  Top 0.254: R16.1 JP23.1
  Top 1.016: S8.4 77.26,16.3 77.22,16.26 | R16.1 77.22,16.26 | 77.22,16.26 R15.P$2
N$16  (via drill 0.51)
  Top 1.016: JP22.2 81.3,11.16 v79.76,12.7 | S8.5 v79.76,20.07
  Bottom 1.016: v79.76,20.07 v79.76,12.7
N$17
  Top 0.254: R18.1 JP26.1
  Top 1.016: S9.4 87.92,16.3 87.88,16.26 | R18.1 87.88,16.26 | 87.88,16.26 R17.P$2
N$18  (via drill 0.51)
  Top 1.016: JP25.2 91.96,11.16 v90.42,12.7 | S9.5 v90.42,20.07
  Bottom 1.016: v90.42,20.07 v90.42,12.7
N$19
  Top 0.254: R20.1 JP29.1
  Top 1.016: S10.4 98.59,16.3 98.55,16.26 | R20.1 98.55,16.26 | 98.55,16.26 R19.P$2
N$20  (via drill 0.51)
  Top 1.016: JP28.2 102.63,11.16 v101.09,12.7 | S10.5 v101.09,20.07
  Bottom 1.016: v101.09,20.07 v101.09,12.7
N$21
  Top 0.254: R22.1 JP32.1
  Top 1.016: S11.4 2.58,49.32 2.54,49.28 | R22.1 2.54,49.28 | 2.54,49.28 R21.P$2
N$22  (via drill 0.51)
  Top 1.016: JP31.2 6.62,44.18 v5.08,45.72 | S11.5 v5.08,53.09
  Bottom 1.016: v5.08,53.09 v5.08,45.72
N$23
  Top 0.254: R24.1 JP35.1
  Top 1.016: S12.4 13.25,49.32 13.21,49.28 | R24.1 13.21,49.28 | 13.21,49.28 R23.P$2
N$24  (via drill 0.51)
  Top 1.016: JP34.2 17.29,44.18 v15.75,45.72 | S12.5 v15.75,53.09
  Bottom 1.016: v15.75,53.09 v15.75,45.72
N$25
  Top 0.254: R26.1 JP38.1
  Top 1.016: S13.4 23.92,49.32 23.88,49.28 | R26.1 23.88,49.28 | 23.88,49.28 R25.P$2
N$26  (via drill 0.51)
  Top 1.016: JP37.2 27.96,44.18 v26.42,45.72 | S13.5 v26.42,53.09
  Bottom 1.016: v26.42,53.09 v26.42,45.72
N$27
  Top 0.254: R28.1 JP41.1
  Top 1.016: S14.4 34.58,49.32 34.54,49.28 | R28.1 34.54,49.28 | 34.54,49.28 R27.P$2
N$28  (via drill 0.51)
  Top 1.016: JP40.2 38.62,44.18 v37.08,45.72 | S14.5 v37.08,53.09
  Bottom 1.016: v37.08,53.09 v37.08,45.72
N$29
  Top 0.254: R30.1 JP44.1
  Top 1.016: S15.4 45.25,49.32 45.21,49.28 | R30.1 45.21,49.28 | 45.21,49.28 R29.P$2
N$30  (via drill 0.51)
  Top 1.016: JP43.2 49.29,44.18 v47.75,45.72 | S15.5 v47.75,53.09
  Bottom 1.016: v47.75,53.09 v47.75,45.72
N$31
  Top 0.254: R32.1 JP47.1
  Top 1.016: S16.4 55.92,49.32 55.88,49.28 | R32.1 55.88,49.28 | 55.88,49.28 R31.P$2
N$32  (via drill 0.51)
  Top 1.016: JP46.2 59.96,44.18 v58.42,45.72 | S16.5 v58.42,53.09
  Bottom 1.016: v58.42,53.09 v58.42,45.72
N$33
  Top 0.254: R34.1 JP50.1
  Top 1.016: S17.4 66.59,49.32 66.55,49.28 | R34.1 66.55,49.28 | 66.55,49.28 R33.P$2
N$34  (via drill 0.51)
  Top 1.016: JP49.2 70.63,44.18 v69.09,45.72 | S17.5 v69.09,53.09
  Bottom 1.016: v69.09,53.09 v69.09,45.72
N$35
  Top 0.254: R36.1 JP53.1
  Top 1.016: S18.4 77.26,49.32 77.22,49.28 | R36.1 77.22,49.28 | 77.22,49.28 R35.P$2
N$36  (via drill 0.51)
  Top 1.016: JP52.2 81.3,44.18 v79.76,45.72 | S18.5 v79.76,53.09
  Bottom 1.016: v79.76,53.09 v79.76,45.72
N$37
  Top 0.254: R38.1 JP56.1
  Top 1.016: S19.4 87.92,49.32 87.88,49.28 | R38.1 87.88,49.28 | 87.88,49.28 R37.P$2
N$38  (via drill 0.51)
  Top 1.016: JP55.2 91.96,44.18 v90.42,45.72 | S19.5 v90.42,53.09
  Bottom 1.016: v90.42,53.09 v90.42,45.72
N$39
  Top 0.254: R40.1 JP59.1
  Top 1.016: S20.4 98.59,49.32 98.55,49.28 | R40.1 98.55,49.28 | 98.55,49.28 R39.P$2
N$40  (via drill 0.51)
  Top 1.016: JP58.2 102.63,44.18 v101.09,45.72 | S20.5 v101.09,53.09
  Bottom 1.016: v101.09,53.09 v101.09,45.72
N$41
  Top 0.254: R42.1 JP62.1
  Top 1.016: S21.4 2.58,82.34 2.54,82.3 | R42.1 2.54,82.3 | 2.54,82.3 R41.P$2
N$42  (via drill 0.51)
  Top 1.016: JP61.2 6.62,77.2 v5.08,78.74 | S21.5 v5.08,86.11
  Bottom 1.016: v5.08,86.11 v5.08,78.74
N$43
  Top 0.254: R44.1 JP65.1
  Top 1.016: S22.4 13.25,82.34 13.21,82.3 | R44.1 13.21,82.3 | 13.21,82.3 R43.P$2
N$44  (via drill 0.51)
  Top 1.016: JP64.2 17.29,77.2 v15.75,78.74 | S22.5 v15.75,86.11
  Bottom 1.016: v15.75,86.11 v15.75,78.74
N$45
  Top 0.254: R46.1 JP68.1
  Top 1.016: S23.4 23.92,82.34 23.88,82.3 | R46.1 23.88,82.3 | 23.88,82.3 R45.P$2
N$46  (via drill 0.51)
  Top 1.016: JP67.2 27.96,77.2 v26.42,78.74 | S23.5 v26.42,86.11
  Bottom 1.016: v26.42,86.11 v26.42,78.74
N$47
  Top 0.254: R48.1 JP71.1
  Top 1.016: S24.4 34.58,82.34 34.54,82.3 | R48.1 34.54,82.3 | 34.54,82.3 R47.P$2
N$48  (via drill 0.51)
  Top 1.016: JP70.2 38.62,77.2 v37.08,78.74 | S24.5 v37.08,86.11
  Bottom 1.016: v37.08,86.11 v37.08,78.74
N$49
  Top 0.254: R50.1 JP74.1
  Top 1.016: S25.4 45.25,82.34 45.21,82.3 | R50.1 45.21,82.3 | 45.21,82.3 R49.P$2
N$50  (via drill 0.51)
  Top 1.016: JP73.2 49.29,77.2 v47.75,78.74 | S25.5 v47.75,86.11
  Bottom 1.016: v47.75,86.11 v47.75,78.74
N$51
  Top 0.254: R52.1 JP77.1
  Top 1.016: S26.4 55.92,82.34 55.88,82.3 | R52.1 55.88,82.3 | 55.88,82.3 R51.P$2
N$52  (via drill 0.51)
  Top 1.016: JP76.2 59.96,77.2 v58.42,78.74 | S26.5 v58.42,86.11
  Bottom 1.016: v58.42,86.11 v58.42,78.74
N$53
  Top 0.254: R54.1 JP80.1
  Top 1.016: S27.4 66.59,82.34 66.55,82.3 | R54.1 66.55,82.3 | 66.55,82.3 R53.P$2
N$54  (via drill 0.51)
  Top 1.016: JP79.2 70.63,77.2 v69.09,78.74 | S27.5 v69.09,86.11
  Bottom 1.016: v69.09,86.11 v69.09,78.74
N$55
  Top 0.254: R56.1 JP83.1
  Top 1.016: S28.4 77.26,82.34 77.22,82.3 | R56.1 77.22,82.3 | 77.22,82.3 R55.P$2
N$56  (via drill 0.51)
  Top 1.016: JP82.2 81.3,77.2 v79.76,78.74 | S28.5 v79.76,86.11
  Bottom 1.016: v79.76,86.11 v79.76,78.74
N$57
  Top 0.254: R58.1 JP86.1
  Top 1.016: S29.4 87.92,82.34 87.88,82.3 | R58.1 87.88,82.3 | 87.88,82.3 R57.P$2
N$58  (via drill 0.51)
  Top 1.016: JP85.2 91.96,77.2 v90.42,78.74 | S29.5 v90.42,86.11
  Bottom 1.016: v90.42,86.11 v90.42,78.74
N$59
  Top 0.254: R60.1 JP89.1
  Top 1.016: S30.4 98.59,82.34 98.55,82.3 | R60.1 98.55,82.3 | 98.55,82.3 R59.P$2
N$60  (via drill 0.51)
  Top 1.016: JP88.2 102.63,77.2 v101.09,78.74 | S30.5 v101.09,86.11
  Bottom 1.016: v101.09,86.11 v101.09,78.74
SINK1
  pour Top (isolate 0.381): 10.16,23.88 10.13,24.61 9.35,25.43 8.38,25.83 7.21,26.29 5.51,26.62 4.04,26.57 2.92,26.26 arc16 0.03,24.74 0,21.84 10.16,21.84
SINK2
  pour Top (isolate 0.381): 10.16,16.51 10.16,21.21 0,21.21 0,16.51
SINK3
  pour Top (isolate 0.381): 20.83,23.88 20.8,24.61 20.02,25.43 19.05,25.83 17.88,26.29 16.18,26.62 14.71,26.57 13.59,26.26 arc16 10.69,24.74 10.67,21.84 20.83,21.84
SINK4
  pour Top (isolate 0.381): 20.83,16.51 20.83,21.21 10.67,21.21 10.67,16.51
SINK5
  pour Top (isolate 0.381): 31.5,23.88 31.47,24.61 30.68,25.43 29.72,25.83 28.55,26.29 26.85,26.62 25.37,26.57 24.26,26.26 arc16 21.36,24.74 21.34,21.84 31.5,21.84
SINK6
  pour Top (isolate 0.381): 31.5,16.51 31.5,21.21 21.34,21.21 21.34,16.51
SINK7
  pour Top (isolate 0.381): 42.16,23.88 42.14,24.61 41.35,25.43 40.39,25.83 39.22,26.29 37.52,26.62 36.04,26.57 34.92,26.26 arc16 32.03,24.74 32,21.84 42.16,21.84
SINK8
  pour Top (isolate 0.381): 42.16,16.51 42.16,21.21 32,21.21 32,16.51
SINK9
  pour Top (isolate 0.381): 52.83,23.88 52.81,24.61 52.02,25.43 51.05,25.83 49.89,26.29 48.18,26.62 46.71,26.57 45.59,26.26 arc16 42.7,24.74 42.67,21.84 52.83,21.84
SINK10
  pour Top (isolate 0.381): 52.83,16.51 52.83,21.21 42.67,21.21 42.67,16.51
SINK11
  pour Top (isolate 0.381): 63.5,23.88 63.47,24.61 62.69,25.43 61.72,25.83 60.55,26.29 58.85,26.62 57.38,26.57 56.26,26.26 arc16 53.37,24.74 53.34,21.84 63.5,21.84
SINK12
  pour Top (isolate 0.381): 63.5,16.51 63.5,21.21 53.34,21.21 53.34,16.51
SINK13
  pour Top (isolate 0.381): 74.17,23.88 74.14,24.61 73.36,25.43 72.39,25.83 71.22,26.29 69.52,26.62 68.05,26.57 66.93,26.26 arc16 64.03,24.74 64.01,21.84 74.17,21.84
SINK14
  pour Top (isolate 0.381): 74.17,16.51 74.17,21.21 64.01,21.21 64.01,16.51
SINK15
  pour Top (isolate 0.381): 84.84,23.88 84.81,24.61 84.02,25.43 83.06,25.83 81.89,26.29 80.19,26.62 78.71,26.57 77.6,26.26 arc16 74.7,24.74 74.68,21.84 84.84,21.84
SINK16
  pour Top (isolate 0.381): 84.84,16.51 84.84,21.21 74.68,21.21 74.68,16.51
SINK17
  pour Top (isolate 0.381): 95.5,23.88 95.48,24.61 94.69,25.43 93.73,25.83 92.56,26.29 90.86,26.62 89.38,26.57 88.27,26.26 arc16 85.37,24.74 85.34,21.84 95.5,21.84
SINK18
  pour Top (isolate 0.381): 95.5,16.51 95.5,21.21 85.34,21.21 85.34,16.51
SINK19
  pour Top (isolate 0.381): 106.17,23.88 106.15,24.61 105.36,25.43 104.39,25.83 103.23,26.29 101.52,26.62 100.05,26.57 98.93,26.26 arc16 96.04,24.74 96.01,21.84 106.17,21.84
SINK20
  pour Top (isolate 0.381): 106.17,16.51 106.17,21.21 96.01,21.21 96.01,16.51
SINK21
  pour Top (isolate 0.381): 10.16,56.9 10.13,57.63 9.35,58.45 8.38,58.85 7.21,59.31 5.51,59.64 4.04,59.59 2.92,59.28 arc16 0.03,57.76 0,54.86 10.16,54.86
SINK22
  pour Top (isolate 0.381): 10.16,49.53 10.16,54.23 0,54.23 0,49.53
SINK23
  pour Top (isolate 0.381): 20.83,56.9 20.8,57.63 20.02,58.45 19.05,58.85 17.88,59.31 16.18,59.64 14.71,59.59 13.59,59.28 arc16 10.69,57.76 10.67,54.86 20.83,54.86
SINK24
  pour Top (isolate 0.381): 20.83,49.53 20.83,54.23 10.67,54.23 10.67,49.53
SINK25
  pour Top (isolate 0.381): 31.5,56.9 31.47,57.63 30.68,58.45 29.72,58.85 28.55,59.31 26.85,59.64 25.37,59.59 24.26,59.28 arc16 21.36,57.76 21.34,54.86 31.5,54.86
SINK26
  pour Top (isolate 0.381): 31.5,49.53 31.5,54.23 21.34,54.23 21.34,49.53
SINK27
  pour Top (isolate 0.381): 42.16,56.9 42.14,57.63 41.35,58.45 40.39,58.85 39.22,59.31 37.52,59.64 36.04,59.59 34.92,59.28 arc16 32.03,57.76 32,54.86 42.16,54.86
SINK28
  pour Top (isolate 0.381): 42.16,49.53 42.16,54.23 32,54.23 32,49.53
SINK29
  pour Top (isolate 0.381): 52.83,56.9 52.81,57.63 52.02,58.45 51.05,58.85 49.89,59.31 48.18,59.64 46.71,59.59 45.59,59.28 arc16 42.7,57.76 42.67,54.86 52.83,54.86
SINK30
  pour Top (isolate 0.381): 52.83,49.53 52.83,54.23 42.67,54.23 42.67,49.53
SINK31
  pour Top (isolate 0.381): 63.5,56.9 63.47,57.63 62.69,58.45 61.72,58.85 60.55,59.31 58.85,59.64 57.38,59.59 56.26,59.28 arc16 53.37,57.76 53.34,54.86 63.5,54.86
SINK32
  pour Top (isolate 0.381): 63.5,49.53 63.5,54.23 53.34,54.23 53.34,49.53
SINK33
  pour Top (isolate 0.381): 74.17,56.9 74.14,57.63 73.36,58.45 72.39,58.85 71.22,59.31 69.52,59.64 68.05,59.59 66.93,59.28 arc16 64.03,57.76 64.01,54.86 74.17,54.86
SINK34
  pour Top (isolate 0.381): 74.17,49.53 74.17,54.23 64.01,54.23 64.01,49.53
SINK35
  pour Top (isolate 0.381): 84.84,56.9 84.81,57.63 84.02,58.45 83.06,58.85 81.89,59.31 80.19,59.64 78.71,59.59 77.6,59.28 arc16 74.7,57.76 74.68,54.86 84.84,54.86
SINK36
  pour Top (isolate 0.381): 84.84,49.53 84.84,54.23 74.68,54.23 74.68,49.53
SINK37
  pour Top (isolate 0.381): 95.5,56.9 95.48,57.63 94.69,58.45 93.73,58.85 92.56,59.31 90.86,59.64 89.38,59.59 88.27,59.28 arc16 85.37,57.76 85.34,54.86 95.5,54.86
SINK38
  pour Top (isolate 0.381): 95.5,49.53 95.5,54.23 85.34,54.23 85.34,49.53
SINK39
  pour Top (isolate 0.381): 106.17,56.9 106.15,57.63 105.36,58.45 104.39,58.85 103.23,59.31 101.52,59.64 100.05,59.59 98.93,59.28 arc16 96.04,57.76 96.01,54.86 106.17,54.86
SINK40
  pour Top (isolate 0.381): 106.17,49.53 106.17,54.23 96.01,54.23 96.01,49.53
SINK41
  pour Top (isolate 0.381): 10.16,89.92 10.13,90.65 9.35,91.47 8.38,91.87 7.21,92.33 5.51,92.66 4.04,92.61 2.92,92.3 arc16 0.03,90.78 0,87.88 10.16,87.88
SINK42
  pour Top (isolate 0.381): 10.16,82.55 10.16,87.25 0,87.25 0,82.55
SINK43
  pour Top (isolate 0.381): 20.83,89.92 20.8,90.65 20.02,91.47 19.05,91.87 17.88,92.33 16.18,92.66 14.71,92.61 13.59,92.3 arc16 10.69,90.78 10.67,87.88 20.83,87.88
SINK44
  pour Top (isolate 0.381): 20.83,82.55 20.83,87.25 10.67,87.25 10.67,82.55
SINK45
  pour Top (isolate 0.381): 31.5,89.92 31.47,90.65 30.68,91.47 29.72,91.87 28.55,92.33 26.85,92.66 25.37,92.61 24.26,92.3 arc16 21.36,90.78 21.34,87.88 31.5,87.88
SINK46
  pour Top (isolate 0.381): 31.5,82.55 31.5,87.25 21.34,87.25 21.34,82.55
SINK47
  pour Top (isolate 0.381): 42.16,89.92 42.14,90.65 41.35,91.47 40.39,91.87 39.22,92.33 37.52,92.66 36.04,92.61 34.92,92.3 arc16 32.03,90.78 32,87.88 42.16,87.88
SINK48
  pour Top (isolate 0.381): 42.16,82.55 42.16,87.25 32,87.25 32,82.55
SINK49
  pour Top (isolate 0.381): 52.83,89.92 52.81,90.65 52.02,91.47 51.05,91.87 49.89,92.33 48.18,92.66 46.71,92.61 45.59,92.3 arc16 42.7,90.78 42.67,87.88 52.83,87.88
SINK50
  pour Top (isolate 0.381): 52.83,82.55 52.83,87.25 42.67,87.25 42.67,82.55
SINK51
  pour Top (isolate 0.381): 63.5,89.92 63.47,90.65 62.69,91.47 61.72,91.87 60.55,92.33 58.85,92.66 57.38,92.61 56.26,92.3 arc16 53.37,90.78 53.34,87.88 63.5,87.88
SINK52
  pour Top (isolate 0.381): 63.5,82.55 63.5,87.25 53.34,87.25 53.34,82.55
SINK53
  pour Top (isolate 0.381): 74.17,89.92 74.14,90.65 73.36,91.47 72.39,91.87 71.22,92.33 69.52,92.66 68.05,92.61 66.93,92.3 arc16 64.03,90.78 64.01,87.88 74.17,87.88
SINK54
  pour Top (isolate 0.381): 74.17,82.55 74.17,87.25 64.01,87.25 64.01,82.55
SINK55
  pour Top (isolate 0.381): 84.84,89.92 84.81,90.65 84.02,91.47 83.06,91.87 81.89,92.33 80.19,92.66 78.71,92.61 77.6,92.3 arc16 74.7,90.78 74.68,87.88 84.84,87.88
SINK56
  pour Top (isolate 0.381): 84.84,82.55 84.84,87.25 74.68,87.25 74.68,82.55
SINK57
  pour Top (isolate 0.381): 95.5,89.92 95.48,90.65 94.69,91.47 93.73,91.87 92.56,92.33 90.86,92.66 89.38,92.61 88.27,92.3 arc16 85.37,90.78 85.34,87.88 95.5,87.88
SINK58
  pour Top (isolate 0.381): 95.5,82.55 95.5,87.25 85.34,87.25 85.34,82.55
SINK59
  pour Top (isolate 0.381): 106.17,89.92 106.15,90.65 105.36,91.47 104.39,91.87 103.23,92.33 101.52,92.66 100.05,92.61 98.93,92.3 arc16 96.04,90.78 96.01,87.88 106.17,87.88
SINK60
  pour Top (isolate 0.381): 106.17,82.55 106.17,87.25 96.01,87.25 96.01,82.55

## Text on the board
Bottom: v14 | v14 | v14 | v14 | v14 | v14 | v14 | v14 | v14 | v14 | v14 | v14 | v14 | v14 | v14 | v14 | v14 | v14 | v14 | v14 | v14 | v14 | v14 | v14 | v14 | v14 | v14 | v14 | v14 | v14
tPlace: + | + | + | + | + | + | + | + | + | + | ON | OFF | ON | OFF | ON | OFF | ON | OFF | ON | OFF | ON | OFF | ON | OFF | ON | OFF | ON | OFF | ON | OFF | - | - | - | - | - | - | - | - | - | - | + | + | + | + | + | + | + | + | + | + | ON | OFF | ON | OFF | ON | OFF | ON | OFF | ON | OFF | ON | OFF | ON | OFF | ON | OFF | ON | OFF | ON | OFF | - | - | - | - | - | - | - | - | - | - | + | + | + | + | + | + | + | + | + | + | ON | OFF | ON | OFF | ON | OFF | ON | OFF | ON | OFF | ON | OFF | ON | OFF | ON | OFF | ON | OFF | ON | OFF | - | - | - | - | - | - | - | - | - | -